# Altium PCB Sensor_Box_RTD2DIG.PCBDOC (part 2 of 2)
Units mm, origin at the board's own origin, x right, y up, seen from the top; angles counter-clockwise.
Board outline 22.3 x 72.8 mm, 2 copper layers (Top, Bot), stack 1.621 mm thick; 89 components, 78 nets, 328 pads, 185 vias.
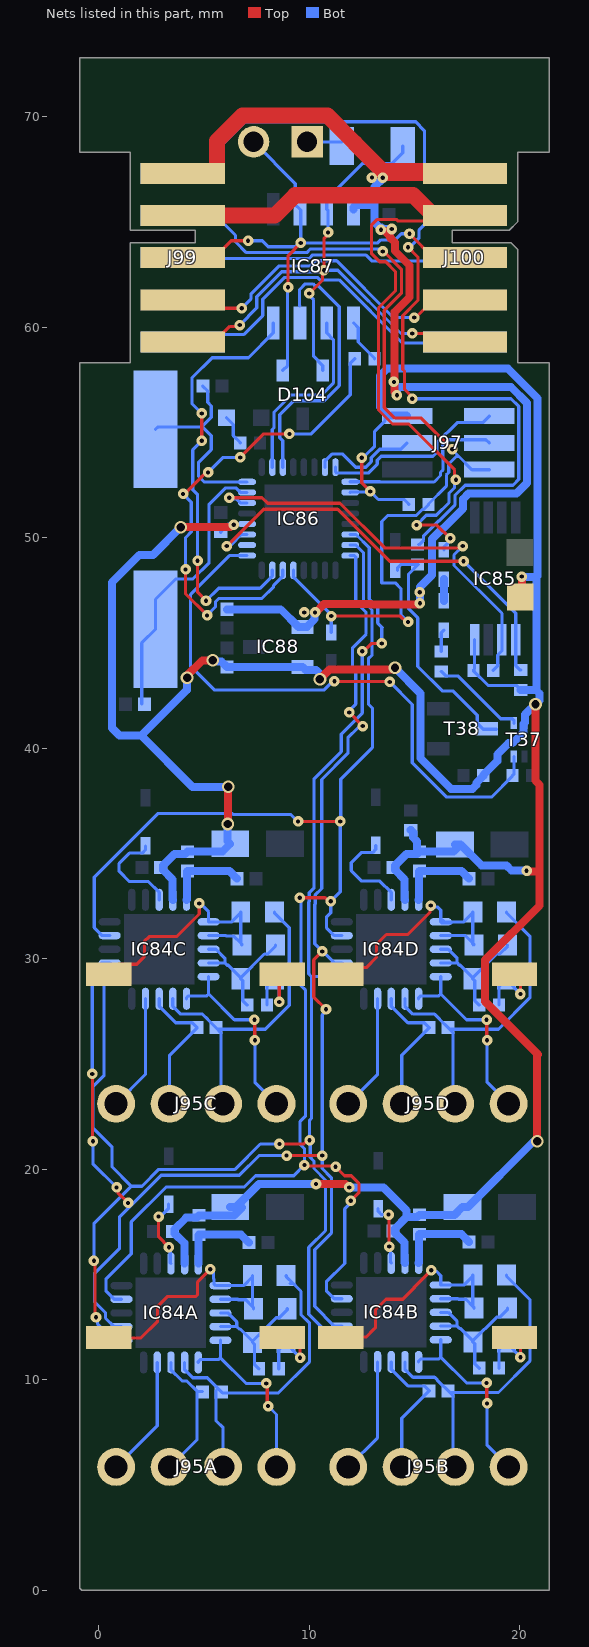
[diagram p2: the nets of this part, all layers, seen from the top]

## Via types
v1: diameter 0.5, hole 0.2, Top to Bot, tented both sides, 171 vias
v2: diameter 0.6, hole 0.4, Top to Bot, tented both sides, 9 vias
v3: diameter 0.5, hole 0.2, Top to Bot, 3 vias
v4: diameter 1.2, hole 0.8, Top to Bot, tented both sides, 2 vias

## Nets (pads, with @x,y where several pads share a name; then routed paths per layer and width w, separated by ;. In a path a pad name is that pad's centre, name@x,y a point inside that pad or via, vN(x,y) a via of type N, cw(c..) or ccw(c..) an arc to the next point about the centre after c; other vN are vias at no path point) (continued)
MODBUS_A: D104.1 IC87.6 J99.3 J100.3 JP8.2 | length 27.3
  Top w0.152: J99.3@4,63.3 5.5,63.3 6.3,64.1 v1(7.1,64.1) ; v1(9,61.9) 9,63.4 v1(9.6,64) ; v1(14.767,64.433) 15.9,63.3 J100.3@17.016,63.3 ; J100.3@16.592,63.724 J100.3@17.016,63.3 ; J100.3@17.4,63.3 J100.3@17.016,63.3
  Bot w0.152: v1(7.1,64.1) 7.774,64.1 8.053,63.821 9.327,63.821 9.506,64 v1(9.6,64) ; JP8.2@7.36,68.8 9.341,66.819 9.341,65.824 IC87.6@9.565,65.6 9.6,65.565 v1(9.6,64) ; D104.1@8.75,57.95 8.974,58.174 8.974,61.874 v1(9,61.9) ; v1(14.767,64.433) 14.383,64.433 14.097,64.147 13.406,64.147 13.259,64 v1(9.6,64)
MODBUS_B: D104.2 IC87.7 J99.5 J100.5 R359.1 | length 30.2
  Top w0.152: J99.5@4,59.3 5.5,59.3 6.234,60.033 6.633,60.033 v1(6.7,60.1) ; v1(10,61.6) 10.633,62.233 10.633,62.633 v1(10.7,62.7) 10.7,64.206 10.9,64.406 v1(10.9,64.5) ; v1(14.9,59.7) 17,59.7 J100.5@17.4,59.3
  Bot w0.152: v1(6.7,60.1) 7.512,60.912 7.512,61.448 8.697,62.632 10.539,62.632 10.606,62.7 11.363,62.7 14.362,59.7 v1(14.9,59.7) ; v1(10,61.6) 10,61.506 10.211,61.295 10.211,58.614 10.65,58.175 D104.2@10.65,57.95 ; v1(10.9,64.5) 10.9,65.535 IC87.7@10.835,65.6 10.835,66.075 12.536,67.776 13.951,67.776 14.45,68.275 R359.1@14.45,68.6
MODBUS_DE: IC86.11 IC87.3 | length 12.9
  Bot w0.152: IC86.11@8.75,53.35 8.75,54.601 8.608,54.743 8.608,55.849 9.259,56.5 10.707,56.5 11.433,57.225 11.433,60.965 10.43,61.967 10.274,61.967 10.188,62.053 9.812,62.053 9.547,61.788 9.547,61.018 9.565,61
MODBUS_DI: IC86.31 IC87.4 | length 20.4
  Top w0.152: v1(4.7,48.9) 4.7,47.41 5.1,47.01 v1(5.1,47) ; v1(4.9,54.6) v1(4.9,55.9)
  Bot w0.152: v1(4.7,48.9) 4.7,52.036 4.467,52.269 4.467,54.167 v1(4.9,54.6) ; v1(4.9,55.9) 4.437,56.363 4.437,57.594 5.39,58.548 7.118,58.548 8.295,59.725 IC87.4@8.295,60.2 ; v1(5.1,47) 5.697,47.597 7.672,47.597 8.25,48.175 IC86.31@8.25,48.45
MODBUS_R_En: IC86.10 IC87.2 | length 9
  Bot w0.152: IC86.10@8.25,53.35 8.25,55.138 8.328,55.216 8.328,55.964 9.143,56.779 10.592,56.779 11.153,57.341 11.153,59.407 10.835,59.725 IC87.2@10.835,60.2
MODBUS_RO: IC86.30 R360.1 | length 23
  Top w0.152: v1(4.014,52.081) 4.098,52.081 5.117,53.1 v1(5.2,53.1) ; v1(4.127,48.494) 4.127,47.332 v1(5.15,46.309) ; v1(6.726,53.813) 7.844,54.931 v1(9.061,54.931)
  Bot w0.152: v1(4.014,52.081) 4.403,51.692 4.403,50.281 4.127,50.005 v1(4.127,48.494) ; v1(5.15,46.309) 5.553,46.712 5.553,46.961 5.706,47.113 7.753,47.113 8.309,47.669 8.309,47.734 8.75,48.175 IC86.30@8.75,48.45 ; v1(5.2,53.1) 5.913,53.813 v1(6.726,53.813) ; v1(9.061,54.931) 9.07,54.922 10.084,54.922 11.949,56.786 11.949,58.286 R360.1@12.162,58.5
NetC156A_1: C156A.1 IC84A.7 J95A.3 R351A.2 | length 15.9
  Bot w0.152: IC84A.7@4.085,10.825 4.085,10.475 4.463,10.097 5.161,10.097 5.438,9.819 5.438,9.812 C156A.1@5.825,9.425 5.878,9.372 8.53,9.372 10.021,10.862 10.021,12.684 9.613,13.091 9.613,14.197 R351A.2@9.284,14.526 ; C156A.1@5.575,9.475 5.575,8.058 5.91,7.723 J95A.3@5.91,5.86 ; R351A.2@8.91,14.95 8.91,14.9 R351A.2@9.234,14.576 ; R351A.2@9.084,14.576 R351A.2@9.234,14.576 ; R351A.2@9.334,14.526 R351A.2@9.284,14.526 ; R351A.2@9.234,14.576 R351A.2@9.284,14.526
NetC156A_2: C156A.2 IC84A.8 J95A.2 | length 6.4
  Bot w0.152: J95A.2@3.37,5.86 4.675,7.165 C156A.2@4.675,9.475 ; IC84A.8@3.435,10.825 3.435,10.475 3.966,9.944 4.181,9.944 4.675,9.45 C156A.2@4.925,9.45
NetC156B_1: C156B.1 IC84B.7 J95B.3 R351B.2 | length 15.7
  Bot w0.152: IC84B.7@14.55,10.85 14.55,10.5 14.928,10.122 15.96,10.122 16.213,9.869 16.213,9.862 C156B.1@16.6,9.475 ; J95B.3@16.935,5.86 16.833,5.962 16.833,9.241 C156B.1@16.6,9.475 ; R351B.2@19.375,14.975 19.375,14.925 20.485,13.814 20.485,10.887 18.995,9.397 16.678,9.397 C156B.1@16.6,9.475
NetC156B_2: C156B.2 IC84B.8 J95B.2 | length 6.7
  Bot w0.152: IC84B.8@13.9,10.85 13.9,10.5 14.691,9.709 15.466,9.709 C156B.2@15.7,9.475 14.395,8.17 J95B.2@14.395,5.86
NetC156C_1: C156C.1 IC84C.7 J95C.3 R351C.2 | length 15.3
  Bot w0.152: IC84C.7@3.525,28.1 3.525,27.75 3.903,27.372 4.936,27.372 5.188,27.119 5.188,27.112 C156C.1@5.575,26.725 ; J95C.3@5.91,23.11 5.809,23.212 5.809,26.491 C156C.1@5.575,26.725 ; R351C.2@8.35,32.225 8.35,32.175 9.053,31.472 9.053,27.787 7.913,26.647 5.653,26.647 C156C.1@5.575,26.725
NetC156C_2: C156C.2 IC84C.8 J95C.2 | length 6.7
  Bot w0.152: IC84C.8@2.875,28.1 2.875,27.75 3.666,26.959 4.441,26.959 C156C.2@4.675,26.725 3.37,25.42 J95C.2@3.37,23.11
NetC156D_1: C156D.1 IC84D.7 J95D.3 R351D.2 | length 15.7
  Bot w0.152: IC84D.7@14.55,28.1 14.55,27.75 14.928,27.372 15.96,27.372 16.213,27.119 16.213,27.112 C156D.1@16.6,26.725 ; J95D.3@16.935,23.11 16.833,23.212 16.833,26.491 C156D.1@16.6,26.725 ; R351D.2@19.375,32.225 19.375,32.175 20.485,31.064 20.485,28.137 18.995,26.647 16.678,26.647 C156D.1@16.6,26.725
NetC156D_2: C156D.2 IC84D.8 J95D.2 | length 6.7
  Bot w0.152: IC84D.8@13.9,28.1 13.9,27.75 14.691,26.959 15.466,26.959 C156D.2@15.7,26.725 14.395,25.42 J95D.2@14.395,23.11
NetC226A_2: C226A.2 IC84A.20 L13A.1 | length 3.9
  Bot w0.381: IC84A.20@4.735,15.525 4.75,15.54 4.75,16.865 L13A.1@4.775,16.89 6.77,16.89 C226A.2@7.135,16.525
NetC226B_2: C226B.2 IC84B.20 L13B.1 | length 3.9
  Bot w0.381: IC84B.20@15.2,15.55 15.215,15.565 15.215,16.89 L13B.1@15.24,16.915 17.235,16.915 C226B.2@17.6,16.55
NetC226C_2: C226C.2 IC84C.20 L13C.1 | length 3.9
  Bot w0.381: IC84C.20@4.175,32.8 4.19,32.815 4.19,34.14 L13C.1@4.215,34.165 6.21,34.165 C226C.2@6.575,33.8
NetC226D_2: C226D.2 IC84D.20 L13D.1 | length 3.9
  Bot w0.381: IC84D.20@15.2,32.8 15.215,32.815 15.215,34.14 L13D.1@15.24,34.165 17.235,34.165 C226D.2@17.6,33.8
NetC228_2: C228.2 IC86.8 Q8.1 | length 9.7
  Bot w0.152: Q8.1@2.7,55.15 2.805,55.255 4.95,55.255 ; C228.2@4.95,57.2 5.184,56.966 5.184,56.424 5.353,56.255 5.353,55.712 4.95,55.309 4.95,55.255 ; IC86.8@7.05,52.65 7.047,52.647 5.012,52.647 4.747,52.912 4.747,53.579 5.353,54.185 5.353,54.851 4.95,55.255
NetC229_2: C229.2 IC86.7 Q8.2 | length 13.5
  Bot w0.152: C229.2@2.05,42.1 2.05,45 Q8.2@2.7,45.65 2.7,47.067 3.674,48.041 4.482,48.041 5.247,48.806 5.247,51.588 6.012,52.353 6.532,52.353 6.735,52.15 IC86.7@7.05,52.15
NetD67_1: D67.1 IC84A.18 | length 3.3
  Top w0.152: v1(2.85,17.751) 2.85,16.788 v1(3.338,16.3)
  Bot w0.152: v1(2.85,17.751) 2.928,17.751 3.325,18.148 D67.1@3.325,18.338 ; v1(3.338,16.3) 3.397,16.241 3.397,15.563 IC84A.18@3.435,15.525
NetD97_1: D97.1 IC84B.18 | length 3
  Top w0.152: v1(13.775,17.85) 13.789,17.836 13.789,16.339 v1(13.803,16.325)
  Bot w0.152: D97.1@13.275,18.12 13.275,18.004 13.429,17.85 v1(13.775,17.85) ; v1(13.803,16.325) 13.862,16.266 13.862,15.588 IC84B.18@13.9,15.55
NetD98_1: D98.1 IC84C.18 | length 4.8
  Bot w0.152: D98.1@2.225,35.36 2.225,35.17 2.071,35.016 1.461,35.016 0.972,34.527 0.972,34.152 1.454,33.67 2.355,33.67 2.875,33.15 IC84C.18@2.875,32.8
NetD99_1: D99.1 IC84D.18 | length 4.7
  Bot w0.152: D99.1@13.167,35.385 13.167,35.195 13.013,35.041 12.474,35.041 11.996,34.563 11.996,34.187 12.495,33.688 13.362,33.688 13.9,33.15 IC84D.18@13.9,32.8
NetD100_2: D100.2 D101.1 | length 1
  Bot w0.381: D101.1@16.4,47 D100.2@16.4,48.03
NetD101_2: D101.2 R356.2 | length 1.1
  Bot w0.152: R356.2@16.275,44.588 16.275,45.475 D101.2@16.4,45.6
NetD103_1: D103.1 R362.2 T38.3 | length 11.6
  Bot w0.152: D103.1@14.192,48.45 14.192,48.556 14.366,48.73 R362.2@15.18,48.73 ; R362.2@15.2,48.73 R362.2@15.18,48.73 ; T38.3@18.883,40.9 18.264,40.9 17.984,41.18 17.984,41.562 16.824,42.723 16.313,42.723 15.153,43.883 15.153,46.188 14.725,46.616 14.725,48.275 R362.2@15.18,48.73
NetIC84A_1: IC84A.1 IC84A.2 R350A.2 R351A.1 SW1A.1 | length 13.7
  Top w0.152: SW1A.1@0.475,12.01 0.5,11.985 2.01,11.985 2.8,12.775 2.8,13.494 3.256,13.95 4.6,13.95 4.7,14.05 4.7,14.65 v3(5.3,15.25) ; SW1A.1@1.035,12.045 SW1A.1@1.474,12.484
  Bot w0.152: v3(5.3,15.25) 5.325,15.25 5.45,15.125 5.45,14.81 5.477,14.783 5.477,14.566 5.568,14.475 IC84A.1@5.785,14.475 6.885,14.475 R351A.1@7.31,14.9 ; IC84A.2@5.785,13.825 6.61,13.825 6.636,13.799 6.986,13.799 R350A.2@7.31,13.475 ; R351A.1@7.31,14.95 R351A.1@7.31,14.9 ; R350A.2@7.36,13.375 7.36,13.425 R350A.2@7.31,13.475 ; R350A.2@7.31,13.475 R351A.1@7.31,14.9
NetIC84A_3: IC84A.3 IC84A.4 R348A.1 R349A.1 R350A.1 | length 6.7
  Bot w0.152: IC84A.4@5.785,12.525 6.56,12.525 ; IC84A.3@5.785,13.175 6.135,13.175 6.56,12.75 6.56,12.525 ; R349A.1@7.615,10.525 7.401,10.739 7.401,11.684 R348A.1@7.31,11.775 R348A.1@7.31,11.825 ; R350A.1@8.96,13.375 8.96,13.325 8.586,12.951 8.436,12.951 R348A.1@7.31,11.825 ; 6.56,12.525 6.671,12.414 6.721,12.414 R348A.1@7.31,11.825
NetIC84A_5: IC84A.5 IC84A.6 J95A.4 | length 8.8
  Top w0.152: v1(7.96,9.825) 8.005,9.78 8.005,8.889 v1@8.05,8.844
  Bot w0.152: IC84A.6@4.735,10.825 4.735,10.869 4.826,10.961 5.696,10.961 5.785,11.05 ; IC84A.5@5.785,11.875 5.785,11.05 ; v1(7.96,9.825) 7.01,9.825 5.785,11.05 ; v1(8.05,8.75) 8.45,8.35 J95A.4@8.45,5.86
NetIC84A_9: IC84A.9 J95A.1 | length 5.8
  Bot w0.152: J95A.1@0.83,5.86 2.785,7.815 IC84A.9@2.785,10.825
NetIC84B_1: IC84B.1 IC84B.2 R350B.2 R351B.1 SW1B.1 | length 12.1
  Top w0.152: SW1B.1@11.5,12.01 11.522,12.032 12.714,12.032 13.1,12.418 13.1,12.425 13.15,12.475 13.15,13.325 13.65,13.825 14.442,13.825 14.992,14.375 14.992,14.392 v3(15.8,15.2)
  Bot w0.152: v3(15.8,15.2) 15.85,15.15 16.05,15.15 16.25,14.95 IC84B.1@16.25,14.5 17.35,14.5 R351B.1@17.775,14.925 ; IC84B.2@16.25,13.85 17.075,13.85 17.101,13.824 17.451,13.824 R350B.2@17.775,13.5 ; R351B.1@17.775,14.975 R351B.1@17.775,14.925 ; R350B.2@17.825,13.4 17.825,13.45 R350B.2@17.775,13.5 ; R350B.2@17.775,13.5 R351B.1@17.775,14.925
NetIC84B_3: IC84B.3 IC84B.4 R348B.1 R349B.1 R350B.1 | length 6.7
  Bot w0.152: IC84B.4@16.25,12.55 17.025,12.55 ; IC84B.3@16.25,13.2 16.6,13.2 17.025,12.775 17.025,12.55 ; R349B.1@18.08,10.55 17.866,10.764 17.866,11.709 R348B.1@17.775,11.8 R348B.1@17.775,11.85 ; R350B.1@19.425,13.4 19.425,13.35 19.051,12.976 18.901,12.976 R348B.1@17.775,11.85 ; 17.025,12.55 17.135,12.439 17.185,12.439 R348B.1@17.775,11.85
NetIC84B_5: IC84B.5 IC84B.6 J95B.4 | length 9.1
  Top w0.152: v1(18.425,9.85) 18.437,9.837 18.437,8.887 v1(18.45,8.875)
  Bot w0.152: IC84B.6@15.2,10.85 15.2,10.894 15.291,10.986 16.16,10.986 16.25,11.075 ; IC84B.5@16.25,11.9 16.25,11.075 ; v1(18.425,9.85) 17.475,9.85 16.25,11.075 ; v1(18.45,8.875) 18.45,6.885 J95B.4@19.475,5.86
NetIC84B_9: IC84B.9 J95B.1 | length 5.6
  Bot w0.152: J95B.1@11.855,5.86 13.25,7.255 IC84B.9@13.25,10.85
NetIC84C_1: IC84C.1 IC84C.2 R350C.2 R351C.1 SW1C.1 | length 12.5
  Top w0.152: SW1C.1@0.475,29.26 0.949,29.734 1.809,29.734 2.175,30.1 2.175,30.825 2.4,31.05 3.7,31.05 4.775,32.125 v3(4.775,32.625)
  Bot w0.152: v3(4.775,32.625) 4.792,32.608 4.842,32.608 5.225,32.225 IC84C.1@5.225,31.75 6.325,31.75 R351C.1@6.75,32.175 ; IC84C.2@5.225,31.1 6.05,31.1 6.076,31.074 6.426,31.074 R350C.2@6.75,30.75 ; R351C.1@6.75,32.225 R351C.1@6.75,32.175 ; R350C.2@6.8,30.65 6.8,30.7 R350C.2@6.75,30.75 ; R350C.2@6.75,30.75 R351C.1@6.75,32.175
NetIC84C_3: IC84C.3 IC84C.4 R348C.1 R349C.1 R350C.1 | length 6.7
  Bot w0.152: IC84C.4@5.225,29.8 6,29.8 ; IC84C.3@5.225,30.45 5.575,30.45 6,30.025 6,29.8 ; R349C.1@7.055,27.8 6.841,28.014 6.841,28.959 R348C.1@6.75,29.05 R348C.1@6.75,29.1 ; R350C.1@8.4,30.65 8.4,30.6 8.026,30.226 7.876,30.226 R348C.1@6.75,29.1 ; 6,29.8 6.111,29.689 6.161,29.689 R348C.1@6.75,29.1
NetIC84C_5: IC84C.5 IC84C.6 J95C.4 | length 9.1
  Top w0.152: v1(7.4,27.1) 7.412,27.087 7.412,26.137 v1(7.425,26.125)
  Bot w0.152: IC84C.6@4.175,28.1 4.175,28.144 4.266,28.236 5.136,28.236 5.225,28.325 ; IC84C.5@5.225,29.15 5.225,28.325 ; v1(7.4,27.1) 6.45,27.1 5.225,28.325 ; v1(7.425,26.125) 7.425,24.135 J95C.4@8.45,23.11
NetIC84C_9: IC84C.9 J95C.1 | length 5.6
  Bot w0.152: J95C.1@0.83,23.11 2.225,24.505 IC84C.9@2.225,28.1
NetIC84D_1: IC84D.1 IC84D.2 R350D.2 R351D.1 SW1D.1 | length 12.8
  Top w0.152: SW1D.1@11.5,29.26 11.82,29.581 12.714,29.581 13.193,30.06 13.193,30.675 13.668,31.15 14.689,31.15 15.735,32.196 15.735,32.485 v1(15.776,32.527)
  Bot w0.152: v1(15.776,32.527) 15.838,32.464 16.086,32.464 16.25,32.3 IC84D.1@16.25,31.75 16.287,31.712 IC84D.1@16.762,31.712 ; IC84D.2@16.25,31.1 17.425,31.1 R350D.2@17.775,30.75 ; IC84D.1@16.337,31.838 16.425,31.75 17.35,31.75 R351D.1@17.775,32.175 ; R351D.1@17.775,32.225 R351D.1@17.775,32.175 ; R350D.2@17.775,30.75 17.825,30.7 R350D.2@17.825,30.65 17.775,30.7 R350D.2@17.775,30.75 ; R350D.2@17.775,30.75 R351D.1@17.775,32.175
NetIC84D_3: IC84D.3 IC84D.4 R348D.1 R349D.1 R350D.1 | length 6.7
  Bot w0.152: IC84D.4@16.25,29.8 17.025,29.8 ; IC84D.3@16.25,30.45 16.6,30.45 17.025,30.025 17.025,29.8 ; R349D.1@18.08,27.8 17.866,28.014 17.866,28.959 R348D.1@17.775,29.05 R348D.1@17.775,29.1 ; R350D.1@19.425,30.65 19.425,30.6 19.051,30.226 18.901,30.226 R348D.1@17.775,29.1 ; 17.025,29.8 17.135,29.689 17.185,29.689 R348D.1@17.775,29.1
NetIC84D_5: IC84D.5 IC84D.6 J95D.4 | length 9.1
  Top w0.152: v1(18.425,27.1) 18.437,27.087 18.437,26.137 v1(18.45,26.125)
  Bot w0.152: IC84D.6@15.2,28.1 15.2,28.144 15.291,28.236 16.16,28.236 16.25,28.325 ; IC84D.5@16.25,29.15 16.25,28.325 ; v1(18.425,27.1) 17.475,27.1 16.25,28.325 ; v1(18.45,26.125) 18.45,24.135 J95D.4@19.475,23.11
NetIC84D_9: IC84D.9 J95D.1 | length 5.6
  Bot w0.152: J95D.1@11.855,23.11 13.25,24.505 IC84D.9@13.25,28.1
NetIC87_1: IC87.1 R360.2 | length 2.1
  Bot w0.152: IC87.1@12.105,60.2 12.329,59.976 12.329,59.294 13.102,58.52 R360.2@13.102,58.5
NetJ100_7: J100.7 R362.1 | length 26.5
  Top w0.152: v1(14.7,63.8) 15.17,63.33 15.17,61.272 14.447,60.549 14.447,58 14.528,57.919 14.528,57.046 14.9,56.673 v1(14.9,56.6)
  Bot w0.152: v1(14.7,63.8) 14.774,63.8 15.22,64.246 15.22,64.62 15.9,65.3 J100.7@17.4,65.3 ; v1(14.9,56.6) 19.588,56.6 19.953,56.234 19.953,52.766 19.681,52.494 17.413,52.494 16.922,52.003 16.922,51.549 16.16,50.787 16.126,50.787 15.434,50.095 15.434,49.884 15.22,49.67 R362.1@15.2,49.67
NetJP8_1: JP8.1 R359.2 | length 1.6
  Bot w0.152: JP8.1@9.9,68.8 R359.2@11.55,68.8
NetLD29_2: LD29.2 R358.2 | length 1.5
  Bot w0.152: LD29.2@6.075,55.7 6.399,55.376 6.399,54.851 6.73,54.52 R358.2@6.73,54.5
NetR348A_2: R348A.2 R349A.2 SW1A.2 | length 3.4
  Top w0.152: SW1A.2@9.285,11.985 9.567,11.702 v1(9.567,11.05)
  Bot w0.152: R349A.2@8.555,10.525 8.555,11.42 R348A.2@8.91,11.775 8.91,11.725 9.463,11.172 9.463,11.155 v1(9.567,11.05)
NetR348B_2: R348B.2 R349B.2 SW1B.2 | length 3.4
  Top w0.152: SW1B.2@19.75,12.01 20.032,11.727 v1(20.032,11.075)
  Bot w0.152: R349B.2@19.02,10.55 19.02,11.445 R348B.2@19.375,11.8 19.375,11.75 20.032,11.092 v1(20.032,11.075)
NetR348C_2: R348C.2 R349C.2 SW1C.2 | length 4
  Top w0.152: v1(8.575,27.95) 8.575,29.11 SW1C.2@8.725,29.26
  Bot w0.152: R349C.2@7.995,27.8 7.995,28.695 R348C.2@8.35,29.05 8.575,28.825 v1(8.575,27.95)
NetR348D_2: R348D.2 R349D.2 SW1D.2 | length 3.4
  Top w0.152: SW1D.2@19.75,29.26 20.032,28.977 v1(20.032,28.325)
  Bot w0.152: R349D.2@19.02,27.8 19.02,28.695 R348D.2@19.375,29.05 19.375,29 20.032,28.342 v1(20.032,28.325)
NetR356_1: R356.1 T37.1 | length 4.5
  Bot w0.152: R356.1@16.275,43.648 16.489,43.434 17.067,43.434 19.103,41.399 19.651,41.399 19.725,41.325 T37.1@19.725,41.19
P3V3: C224A.1 C224B.1 C224C.1 C224D.1 C225A.1 C225B.1 C225C.1 C225D.1 C227.2 C232.2 IC84A.19 IC84B.19 IC84C.19 IC84D.19 IC85.8 IC86.4 IC86.18 IC88.2 J97.2 L13A.2 L13B.2 L13C.2 L13D.2 R352.2 R353.1 R354.1 R355.1 R361.2 T37.2 TP25.1 | length 156.3
  Top w0.152: v1(12.5,53.8) 12.5,52.61 12.9,52.21 v1(12.9,52.2)
  Top w0.381: v2(3.9,50.5) 6.271,50.5 6.388,50.617 v1(6.42,50.617) ; v2(4.2,43.352) 4.2,43.45 4.927,44.177 v2(5.413,44.177) ; v2(6.125,36.4) 6.138,36.413 6.138,38.15 v2(6.15,38.162) ; v1(10.325,19.3) 11.717,19.3 11.876,19.141 v1(11.908,19.141) ; v2(10.512,43.275) 10.512,43.291 10.965,43.745 v2@14.076,43.745 ; TP25.1@20.025,47.188 20.1,47.263 v1(20.1,48.15) ; v1(20.326,34.177) 20.349,34.154 20.921,34.154 20.95,34.125 ; v2(20.75,42.083) 20.75,38.455 20.95,38.255 20.95,34.125 ; v2(20.826,21.326) 20.826,25.401 20.876,25.451 18.357,27.97 18.357,29.942 20.95,32.534 20.95,34.125
  Bot w0.152: C227.2@5.8,50.25 C227.2@5.8,50.288 6.149,50.637 v1@6.187,50.637 ; IC86.18@11.95,52.15 11.975,52.175 12.875,52.175 v1(12.9,52.2) 13.287,51.813 14.516,51.813 14.73,51.599 R355.1@14.73,51.579 ; v1@12.688,53.926 13.107,54.345 13.107,55.047 13.599,55.539 J97.2@13.599,55.8 ; IC85.8@17.858,45.158 17.858,43.758 R354.1@17.8,43.7 17.8,43.68 18.496,42.984 19.836,42.984 R353.1@20.05,42.77
  Bot w0.381: IC84C.19@3.525,32.8 3.51,32.815 3.51,33.765 3.05,34.225 3.05,34.425 3.6,34.975 4.106,34.975 L13C.2@4.215,35.085 5.875,35.085 C225C.1@6.25,35.46 6.125,35.585 v2(6.125,36.4) ; v2(3.9,50.5) 2.579,49.179 1.93,49.179 0.633,47.882 0.633,40.965 0.997,40.6 2.025,40.6 ; IC84A.19@4.085,15.525 4.069,15.54 4.069,16.49 3.61,16.95 3.61,17.15 4.16,17.7 4.665,17.7 L13A.2@4.775,17.81 6.435,17.81 C225A.1@6.81,18.185 ; v2(4.2,43.352) 4.2,42.775 2.025,40.6 ; v2(5.413,44.177) 5.604,44.177 5.658,44.123 5.828,44.123 C232.2@6.1,43.85 6.104,43.854 9.685,43.854 IC88.2@9.689,43.859 9.824,43.724 10.321,43.724 10.512,43.533 v2(10.512,43.275) ; v2(6.15,38.162) 4.463,38.162 2.025,40.6 ; C225A.1@6.25,18.21 6.525,18.21 7.615,19.3 v1(10.325,19.3) ; v1(11.908,19.141) 13.526,19.141 14.625,18.041 14.625,17.725 ; v2@14.07,43.821 15.291,42.601 15.291,39.525 16.743,38.072 17.752,38.072 17.938,38.258 17.938,38.348 18.27,38.68 R361.2@18.27,38.7 18.27,38.72 18.936,39.386 18.936,39.705 19.47,40.239 19.658,40.239 20.193,40.773 20.193,41.158 T37.2@20.225,41.19 20.258,41.223 20.258,41.607 20.531,41.88 20.547,41.88 v2(20.75,42.083) 20.931,42.265 20.931,42.609 20.77,42.77 ; IC84B.19@14.55,15.55 14.534,15.565 14.534,16.515 14.075,16.975 14.075,17.175 14.625,17.725 ; IC84D.19@14.55,32.8 14.534,32.815 14.534,33.765 14.075,34.225 14.075,34.425 14.625,34.975 15.13,34.975 L13D.2@15.24,35.085 ; J97.2@14.65,55.77 14.62,55.8 13.765,55.8 13.358,56.207 13.358,57.691 13.692,58.025 19.438,58.025 20.855,56.608 20.855,48.18 20.8,48.125 ; R352.2@14.825,36.105 14.845,36.105 14.944,36.006 14.944,35.751 15.12,35.575 15.12,35.194 15.23,35.085 L13D.2@15.24,35.085 ; C225D.1@16.925,35.425 17.2,35.425 16.86,35.085 L13D.2@15.24,35.085 ; C225D.1@17.22,35.405 18.197,34.428 19.375,34.428 19.603,34.199 20.303,34.199 v1(20.326,34.177) ; R353.1@20.05,42.77 20.77,42.77 ; v1(20.1,48.15) 20.123,48.127 20.538,48.127 20.54,48.125 20.8,48.125 ; v2(20.826,21.326) 20.83,21.326 20.853,21.303 20.643,21.303 17.55,18.21 C225B.1@17.275,18.21 16.9,17.835 L13B.2@15.24,17.835 15.13,17.725 14.625,17.725 ; 20.77,42.77 20.8,42.8 20.8,48.125
  other v2: 14.076,43.827
P5V0: C230.1 C231.2 IC87.8 IC88.1 J99.1 J100.1 | length 62.5
  Top w0.381: v1(10.283,46.448) 10.315,46.448 10.71,46.842 12.935,46.842 12.945,46.832 15.17,46.832 15.226,46.889 v1(15.259,46.889) ; v1(13.5,67.1) 13.523,67.123 17.023,67.123 J100.1@17.3,67.4 ; v1@13.6,64.568 13.832,64.335 13.832,64.265 14.067,64.03 14.067,63.63 14.776,62.921 14.776,61.435 14.053,60.712 14.053,57.4 14.053,56.912 14.166,56.798 v1(14.166,56.766)
  Top w0.762: J99.1@5.5,67.3 5.619,67.419 5.619,68.838 6.839,70.058 10.86,70.058 12.171,68.748 12.171,68.729 13.481,67.419 17.281,67.419 J100.1@17.3,67.4
  Bot w0.381: C231.2@6.1,46.6 8.648,46.6 9.489,45.759 IC88.1@9.689,45.759 9.889,45.759 10.26,46.13 10.26,46.425 v1(10.283,46.448) ; IC87.8@12.105,65.6 12.105,65.69 12.214,65.8 13.1,65.8 ; v1(13.5,67.1) 13.5,67.068 13.1,66.668 13.1,66.25 ; v1@13.568,64.6 13.445,64.723 13.358,64.723 13.1,64.981 13.1,65.8 ; v1@13.631,64.663 v1(13.922,64.663) ; C230.1@13.8,66.25 13.1,66.25 ; v1(14.166,56.766) 14.166,57.167 19.577,57.167 20.347,56.397 20.347,52.603 19.844,52.1 17.576,52.1 17.316,51.84 17.316,51.386 16.323,50.393 16.289,50.393 15.827,49.932 15.827,48.228 15.259,47.659 v1(15.259,46.889) ; 13.1,65.8 13.1,66.25
  other v1: 9.769,46.448 15.25,47.407 14.025,57.4 13.411,64.625 12.983,67.107
P12V0: D100.1 J99.2 J100.2 | length 39.6
  Top w0.152: v1(15.1,50.6) 16.07,50.6 v1(16.701,49.969) ; v1(16.973,52.756) 16.907,52.823 16.907,53.22 14.726,55.4 13.958,55.4 13.292,56.066 13.292,60.913 14.103,61.724 14.103,62.633 13.633,63.103 13.356,63.103 12.958,63.501 12.958,64.834 13.24,65.116 14.143,65.116 14.212,65.047 15.547,65.047 15.8,65.3 J100.2@17.4,65.3
  Top w0.762: J99.2@4,65.3 8.364,65.3 9.33,66.266 14.934,66.266 15.8,65.4 J100.2@17.4,65.4
  Bot w0.152: v1(15.1,50.6) 15.566,51.066 16.044,51.066 16.643,51.665 16.643,52.119 16.907,52.383 16.907,52.69 v1(16.973,52.756) ; D100.1@16.4,49.43 16.4,49.555 16.635,49.79 16.635,49.902 v1(16.701,49.969)
PGood: IC86.1 R357.2 T37.6 | length 28.4
  Top w0.152: v1(11.201,43.177) 11.052,43.177 11.037,43.162 13.812,43.162 v1(13.825,43.15)
  Bot w0.152: IC86.1@7.05,49.15 6.214,49.15 4.367,47.303 4.367,43.892 4.404,43.855 4.409,43.855 4.703,43.561 4.703,43.556 5.487,42.772 10.721,42.772 11.126,43.177 v1(11.201,43.177) ; v1(13.825,43.15) 14.897,42.078 14.897,39.308 16.527,37.679 18.66,37.679 19.655,38.674 R357.2@19.655,38.694 19.725,38.764 T37.6@19.725,39.61
PM_RESETn: IC86.2
PROG_MISO: IC86.16 J97.1 | length 9
  Bot w0.152: IC86.16@11.25,53.35 11.25,53.135 11.318,53.067 12.803,53.067 13.233,53.496 13.233,53.68 13.418,53.865 15.882,53.865 16.067,54.05 16.067,54.503 17.03,55.466 18.246,55.466 J97.1@18.55,55.77
PROG_MOSI: IC86.15 J97.4 | length 5.2
  Bot w0.152: IC86.15@10.75,53.35 10.75,53.625 11.103,53.978 11.58,53.978 12.211,53.347 12.688,53.347 12.953,53.612 12.953,53.796 13.354,54.196 14.346,54.196 J97.4@14.65,54.5
PROG_SCK: IC86.17 J97.3 | length 8.3
  Bot w0.152: IC86.17@11.95,52.65 11.953,52.653 13.359,52.653 13.366,52.647 15.934,52.647 16.24,52.953 16.24,53.099 16.353,53.212 16.353,53.797 16.347,53.803 16.347,54.388 16.612,54.653 18.397,54.653 J97.3@18.55,54.5
RESETn: D102.1 IC86.29 J97.5 J99.7 R355.2 | length 44
  Top w0.152: v1(11.05,46.275) 14.331,46.275 14.606,46 v1(14.7,46) ; v1(13.5,63.6) 13.531,63.6 14.383,62.748 14.383,61.608 13.572,60.798 13.572,56.182 14.074,55.679 15.321,55.679 v1(16.8,54.2)
  Bot w0.152: J99.7@4,65.3 5.5,65.3 5.924,64.876 5.982,64.876 6.5,64.358 6.5,64.059 7.018,63.541 9.882,63.541 10.053,63.712 13.294,63.712 13.406,63.6 v1(13.5,63.6) ; IC86.29@9.25,48.45 9.25,48.135 11.05,46.335 v1(11.05,46.275) D102.1@11.05,45.495 ; v1(14.7,46) 14.361,46.339 14.361,47.58 14.088,47.853 13.445,47.853 13.445,50.769 13.729,51.053 15.091,51.053 15.384,51.346 15.456,51.346 15.67,51.559 R355.2@15.67,51.579 15.67,51.599 16.52,52.449 16.52,52.984 16.633,53.096 16.633,53.501 16.989,53.858 17.116,53.858 ; v1(16.8,54.2) 16.8,54.174 17.116,53.858 ; J97.5@17.419,53.541 J97.5@17.73,53.23 ; J97.5@18.55,53.23 J97.5@17.73,53.23 ; 17.116,53.858 17.426,53.548 17.426,53.534 J97.5@17.73,53.23
RSV0: J99.4 J100.4 | length 16.1
  Top w0.152: J99.4@4,61.3 4.4,60.9 v1(6.8,60.9) ; v1(14.992,60.453) 15.053,60.453 15.9,61.3 J100.4@17.4,61.3
  Bot w0.152: v1(6.8,60.9) 7.233,61.333 7.233,61.564 8.581,62.912 10.043,62.912 10.284,63.153 11.305,63.153 14.005,60.453 v1(14.992,60.453)
RSV1: J99.6 J100.6 | length 17
  Bot w0.152: J99.6@4,67.3 5.5,67.3 5.924,67.724 5.924,68.712 6.965,69.753 15.059,69.753 15.476,69.336 15.476,67.724 15.9,67.3 J100.6@17.4,67.3
RSV2: J99.8 J100.8 | length 13.7
  Bot w0.152: J99.8@4,63.3 4.038,63.262 9.998,63.262 10.169,63.432 12.679,63.432 12.965,63.147 17.247,63.147 J100.8@17.4,63.3
RSV3: J99.10 J100.10 | length 16.4
  Bot w0.152: J99.10@4,59.3 4.347,59.647 6.888,59.647 7.792,60.551 7.792,61.333 8.812,62.353 10.406,62.353 10.512,62.247 11.421,62.247 14.421,59.247 17.347,59.247 J100.10@17.4,59.3
SCL1: IC85.6 IC86.6 R354.2 | length 20.3
  Top w0.152: v1(6.2,51.9) 7.759,51.9 8.026,51.633 11.466,51.633 13.583,49.516 17.122,49.516 17.206,49.6 v1(17.3,49.6)
  Bot w0.152: v1(6.2,51.9) 6.266,51.833 6.552,51.833 6.735,51.65 IC86.6@7.05,51.65 ; v1(17.3,49.6) 16.88,49.18 16.88,48.68 19.158,46.402 19.158,44.633 18.954,44.429 18.954,43.914 R354.2@18.74,43.7
SCLK: IC84A.12 IC84B.12 IC84C.12 IC84D.12 IC86.24 | length 71.4
  Top w0.152: v1(-0.3,24.528) -0.287,24.514 -0.287,21.339 v1(-0.273,21.326) ; v1(0.85,19.141) 0.917,19.074 0.917,18.884 v1(1.4,18.401) ; v1(8.925,20.651) 8.929,20.654 10.622,20.654 v1(10.626,20.651) ; v1(10.625,30.35) 10.221,29.946 10.221,28.179 v1(10.8,27.6) ; v1(11.901,41.702) v1(12.551,41.052)
  Bot w0.152: v1(-0.3,24.528) -0.3,29.325 0.175,29.8 IC84C.12@0.525,29.8 ; v1(-0.273,21.326) -0.273,20.264 v1(0.85,19.141) ; IC84A.12@1.085,12.525 0.735,12.525 0.328,12.932 0.328,13.187 -0.202,13.717 -0.202,15.032 0.988,16.222 0.988,17.729 2.975,19.716 6.681,19.716 7.616,20.651 v1(8.925,20.651) ; v1(10.626,20.651) 10.626,27.331 10.8,27.506 v1(10.8,27.6) ; v1@10.633,20.533 10.626,20.526 10.626,20.036 11.058,19.603 11.058,16.969 10.263,16.174 10.263,13.487 11.2,12.55 IC84B.12@11.55,12.55 ; IC84D.12@11.55,29.8 11.187,29.8 10.637,30.35 v1(10.625,30.35) 10.263,30.712 10.263,32.578 10.293,32.608 10.293,33.03 10.597,33.334 10.597,38.515 11.838,39.755 11.838,40.497 v1@12.319,40.978 ; v1@11.86,41.742 12.213,42.094 12.213,43.596 12.062,43.747 12.062,44.779 12.704,45.421 12.704,46.448 12.209,46.943 12.209,49.082 12.141,49.15 IC86.24@11.95,49.15
SDA1: IC85.5 IC86.3 R353.2 | length 20.5
  Top w0.152: v1(6.086,49.601) 7.838,51.353 11.351,51.353 13.82,48.883 v1(17.333,48.883)
  Bot w0.152: v1(6.086,49.601) 6.152,49.668 6.293,49.668 6.775,50.15 IC86.3@7.05,50.15 ; v1(17.333,48.883) 19.808,46.408 IC85.5@19.808,45.158 19.816,45.15 19.816,43.924 20.03,43.71 R353.2@20.05,43.71
SI/RX: IC84A.11 IC84B.11 IC84C.11 IC84D.11 IC86.22 | length 73.2
  Top w0.152: v1(-0.225,15.65) -0.175,15.6 -0.175,13.025 v1(-0.125,12.975) ; v1(8.588,21.2) 9.748,21.2 9.928,21.38 v1(10.022,21.38) ; v1(12.526,44.602) 12.59,44.602 12.965,44.977 v1(13.451,44.977)
  Bot w0.152: v1(-0.225,15.65) -0.225,17.42 1.55,19.195 ; v1(-0.125,12.975) -0.058,12.908 -0.058,12.668 0.735,11.875 IC84A.11@1.085,11.875 ; IC84C.11@0.525,29.15 0.342,29.15 0.251,29.059 0.251,24.438 -0.273,23.914 -0.273,21.967 0.638,21.055 0.638,20.107 1.55,19.195 ; v1(8.588,21.2) 7.685,21.2 6.48,19.995 2.859,19.995 2.059,19.195 1.55,19.195 ; IC84B.11@11.55,11.9 11.2,11.9 9.983,13.116 9.983,16.29 10.778,17.085 10.778,19.488 10.229,20.037 10.229,20.389 10.055,20.563 10.055,21.323 10.112,21.38 10.022,21.47 10.022,22.332 10.112,22.422 10.112,29.15 ; IC84D.11@11.55,29.15 10.112,29.15 ; IC86.22@11.95,50.15 12.225,50.15 12.858,49.517 12.858,47.084 13.263,46.679 13.263,45.942 13.476,45.729 13.451,45.703 v1(13.451,44.977) ; v1(12.526,44.602) 12.526,41.668 11.526,40.668 11.526,39.838 10.233,38.545 10.233,33.365 10.004,33.136 10.004,32.714 9.983,32.693 9.983,29.279 10.112,29.15
SO/TX: IC84A.14 IC84B.14 IC84C.14 IC84D.14 IC86.23 | length 75.3
  Top w0.152: v1(9.475,36.525) v1(11.475,36.525) ; v1(9.55,32.902) 10.756,32.902 10.931,32.727 v1(11.026,32.727) ; v1(9.775,20.201) 9.816,20.161 11.213,20.161 11.68,19.694 11.996,19.694 12.361,19.328 12.361,18.887 v1(11.976,18.501)
  Bot w0.152: IC84C.14@0.525,31.1 0.175,31.1 -0.203,31.478 -0.203,33.869 2.831,36.903 6.333,36.903 6.383,36.853 9.126,36.853 9.455,36.525 v1(9.475,36.525) ; IC84A.14@1.085,13.825 0.735,13.825 0.357,14.203 0.357,14.801 1.547,15.991 1.547,17.497 3.206,19.157 6.915,19.157 7.452,19.694 9.268,19.694 v1(9.775,20.201) ; v1(9.55,32.902) 9.612,32.84 9.612,28.716 9.833,28.496 9.833,22.538 9.569,22.274 9.569,21.193 9.775,20.986 9.775,20.234 v1@9.808,20.201 ; IC84B.14@11.55,13.85 11.2,13.85 10.821,14.228 10.821,14.657 11.688,15.523 11.688,18.119 11.976,18.407 v1(11.976,18.501) ; IC84D.14@11.55,31.1 11.2,31.1 10.821,31.478 10.821,31.98 11.026,32.184 v1(11.026,32.727) 11.475,33.176 11.475,36.4 11.35,36.525 11.504,36.679 11.504,38.529 13.004,40.029 13.004,41.91 12.813,42.101 12.813,44.249 12.983,44.419 12.983,46.563 12.578,46.968 12.578,49.297 12.225,49.65 IC86.23@11.95,49.65
  other v1: 11.253,20.121
pads on no net: IC84A.17 IC84B.17 IC84C.17 IC84D.17 IC86.9 IC86.12 IC86.14 IC86.20 T37.3 T37.4 T37.5

## Polygon pours and split planes (outlines as drawn)
GND on Top "GND_L01_P002" (solid, remove dead copper, pour order 2): -0.85,72.85 -0.8,72.8 21.425,72.8 21.425,68.65 21.225,68.45 19.925,68.45 19.75,68.275 19.775,68.25 19.775,58.25 19.875,58.15 21.2,58.15 21.3,58.05 21.3,1.125 21.15,0.975 -0.825,0.975 -0.825,58.075 -0.7,58.2 1.525,58.2 1.65,58.325 1.65,68.375 1.575,68.45 -0.625,68.45 -0.75,68.575 -0.75,68.725

## Keep-outs
Top:
  lines w0.1: -0.825,0.9 21.3,0.9 ; 0,71.9 21.4,71.9 ; 1.912,58.3 6.008,58.3 6.254,58.546 ; 15,58.3 15.158,58.142 19.519,58.142
Bot:
  lines w0.1: 0,2.65 21.4,2.65 ; 0,70.15 21.4,70.15
KeepOutLayer:
  lines w0.1: 0,68.3 -0.9,68.3 ; 0.6,68.3 -0.9,68.3 ; 1.5,68.3 1.5,64.6 4.6,64.6 4.6,64 1.5,64 1.5,58.3 -0.9,58.3 -0.9,42.9 -0.9,0 0,0 21.4,0 21.4,58.3 19.9,58.3 19.9,63.7 19.8,63.8 19.625,64.102 16.825,64.102 16.8,64.7 19.6,64.7 19.9,65 19.9,68.3 21.4,68.3 21.4,72.8 -0.9,72.8 -0.9,68.3 ; 5.9,62.1 5.9,62.6 ; 5.9,64.1 5.9,64.6 ; -0.9,68.3 -0.9,68.3

## Other copper
Top:
  rectangle net P5V0: 9.697,46.2 10.462,46.675
  rectangle net P5V0: 15.039,46.675 15.481,47.65
  rectangle net P5V0: 13.275,64.25 14.062,64.842
  rectangle net P5V0: 12.736,66.85 13.75,67.7
Bot:
  rectangle net P5V0: 8.775,46.025 10.274,46.675
  rectangle net P5V0: 15.05,46.7 15.466,47.65
  rectangle net P5V0: 13.8,56.766 14.198,57.45
  rectangle net P5V0: 13.167,64.375 13.922,64.85
  rectangle net P5V0: 12.725,66.819 13.765,67.425

## Silkscreen, mask and mechanical layers (free items; w line width, h text height)
TopOverlay:
  text "TERM" at 7.85,65.975 h1
  text "MODBUS" at 6.825,64.525 h1
  text "4 channel" at 4.975,53.55 h1.5
  text "PT100/PT1000" at 1.975,50.975 h1.5
  text "v1.0" at 7.65,48.575 h1.52
  text "1k" at 0.95,32.175 h1.2
  text "100" at 5.35,32.175 h1.2
  text "1k" at 11.875,32.175 h1.2
  text "100" at 16.275,32.175 h1.2
  text "2" at 4.022,18.375 h1
  text "3" at 15.1,18.3 h1
  text "O-I  I+O" at 11.425,17.725 h1.2
  text "O-I  I+O" at 0.325,17.6 h1.2
  text "1k" at 0.9,15 h1.2
  text "100" at 5.3,15 h1.2
  text "1k" at 11.825,15 h1.2
  text "100" at 16.225,15 h1.2
  text "1" at 15.325,1.25 h1
  text "0" at 4.05,1.2 h1
  text "O-I  I+O" at 11.025,0.9 h1.2
  text "O-I  I+O" at 0.375,0.825 h1.2
Mechanical1:
  lines w0.254: -0.9,0.1 -0.9,42.9 -0.9,58.3 1.5,58.3 1.5,64 4.6,64 4.6,64.6 1.5,64.6 1.5,68.3 -0.9,68.3 -0.9,72.8 21.4,72.8 21.4,68.3 19.9,68.3 19.9,65 19.5,64.6 16.8,64.6 16.8,64 19.6,64 19.8,63.8 19.9,63.7 19.9,58.3 21.4,58.3 21.4,0 0,0 -0.8,0 -0.9,0.1

## Text inside footprints (layer, text, board x,y; h text height)
J95A: TopOverlay "4" at 8.069,7.638 h1; TopOverlay "1" at 0.703,7.638 h1; TopOverlay "2" at 2.989,7.638 h1; TopOverlay "3" at 5.529,7.638 h1
J95B: TopOverlay "4" at 19.094,7.638 h1; TopOverlay "1" at 11.728,7.638 h1; TopOverlay "2" at 14.014,7.638 h1; TopOverlay "3" at 16.554,7.638 h1
J95C: TopOverlay "4" at 8.069,24.888 h1; TopOverlay "1" at 0.703,24.888 h1; TopOverlay "2" at 2.989,24.888 h1; TopOverlay "3" at 5.529,24.888 h1
J95D: TopOverlay "4" at 19.094,24.888 h1; TopOverlay "1" at 11.728,24.888 h1; TopOverlay "2" at 14.014,24.888 h1; TopOverlay "3" at 16.554,24.888 h1
J99: TopOverlay "1" at 7.125,66.5 h1.2; TopOverlay "5" at 6.825,58.52 h1.2; BottomOverlay "6" at 7.25,67.7 h1.2 r180; BottomOverlay "10" at 6.95,59.72 h1.2 r180
J100: TopOverlay "5" at 13.875,58.7 h1.2; TopOverlay "1" at 14.175,66.68 h1.2; BottomOverlay "10" at 13,59.9 h1.2 r180; BottomOverlay "6" at 14.05,67.88 h1.2 r180
SW1A: Mechanical14 "ON" at 7.14,12.899 h1 r270
SW1B: Mechanical14 "ON" at 18.165,12.899 h1 r270
SW1C: Mechanical14 "ON" at 7.14,30.149 h1 r270
SW1D: Mechanical14 "ON" at 18.165,30.149 h1 r270